# Altium PCB PCB.PcbDoc
Units mm, origin at the board's own origin, x right, y up, seen from the top; angles counter-clockwise.
Board outline 152.4 x 101.6 mm, 2 copper layers (Top Layer, Bottom Layer); 13 components, 22 nets, 71 pads, 0 vias.
Unrouted connection lines stored in the file: 30.
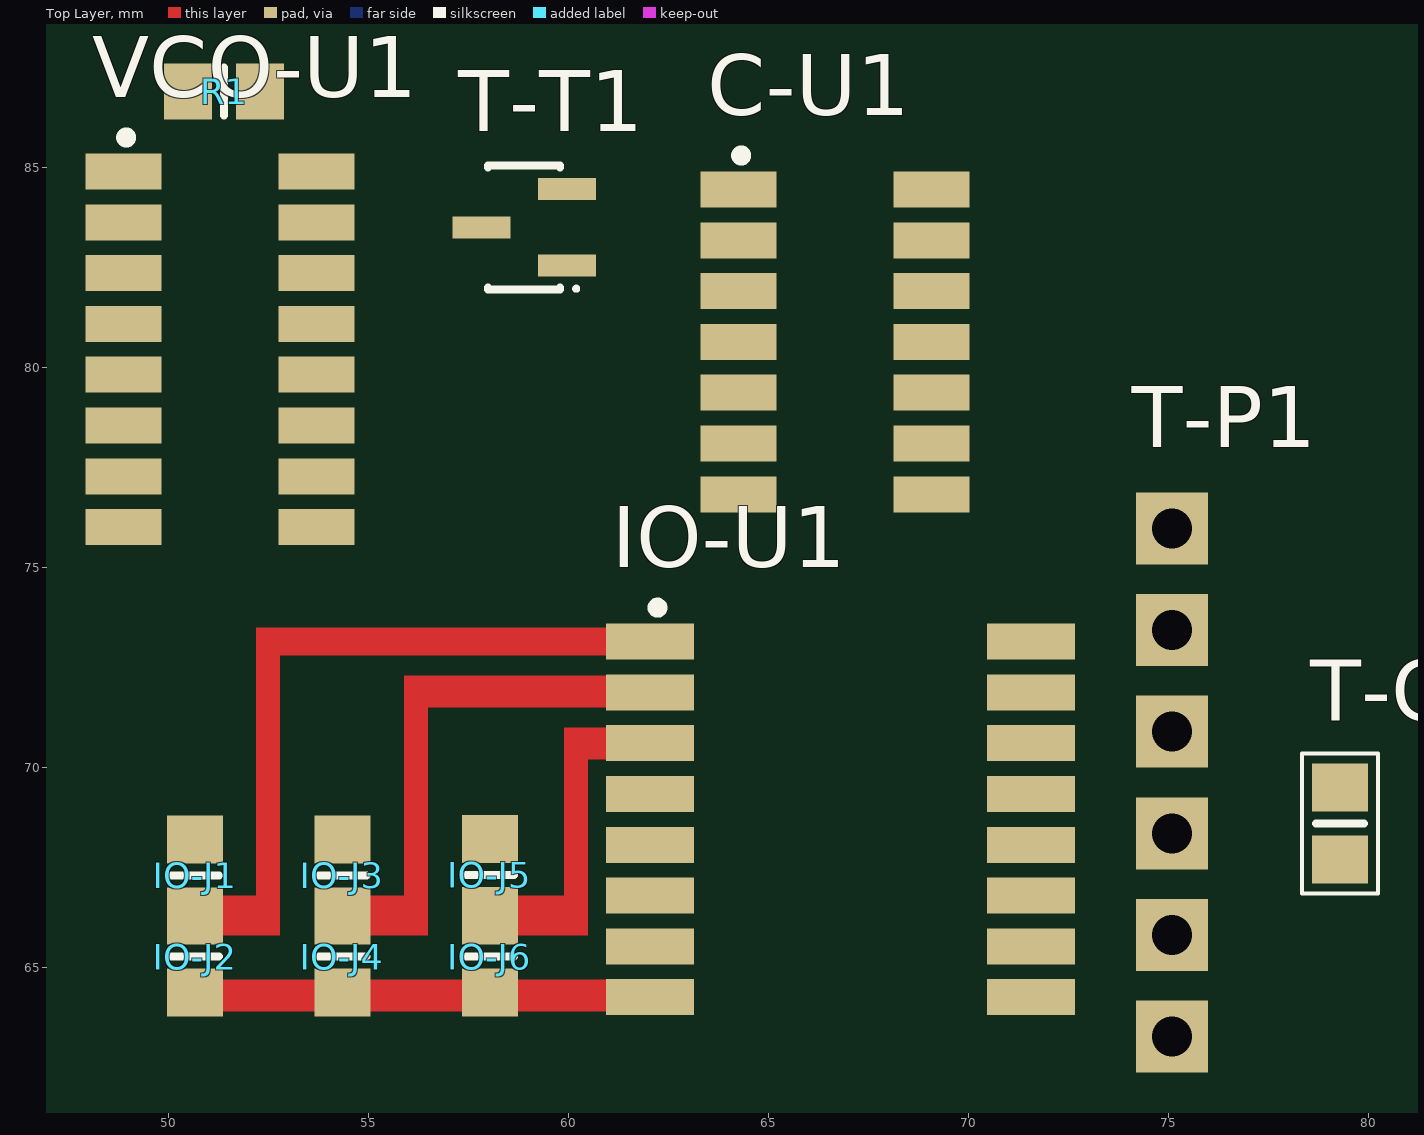
[diagram p0: Top Layer view]
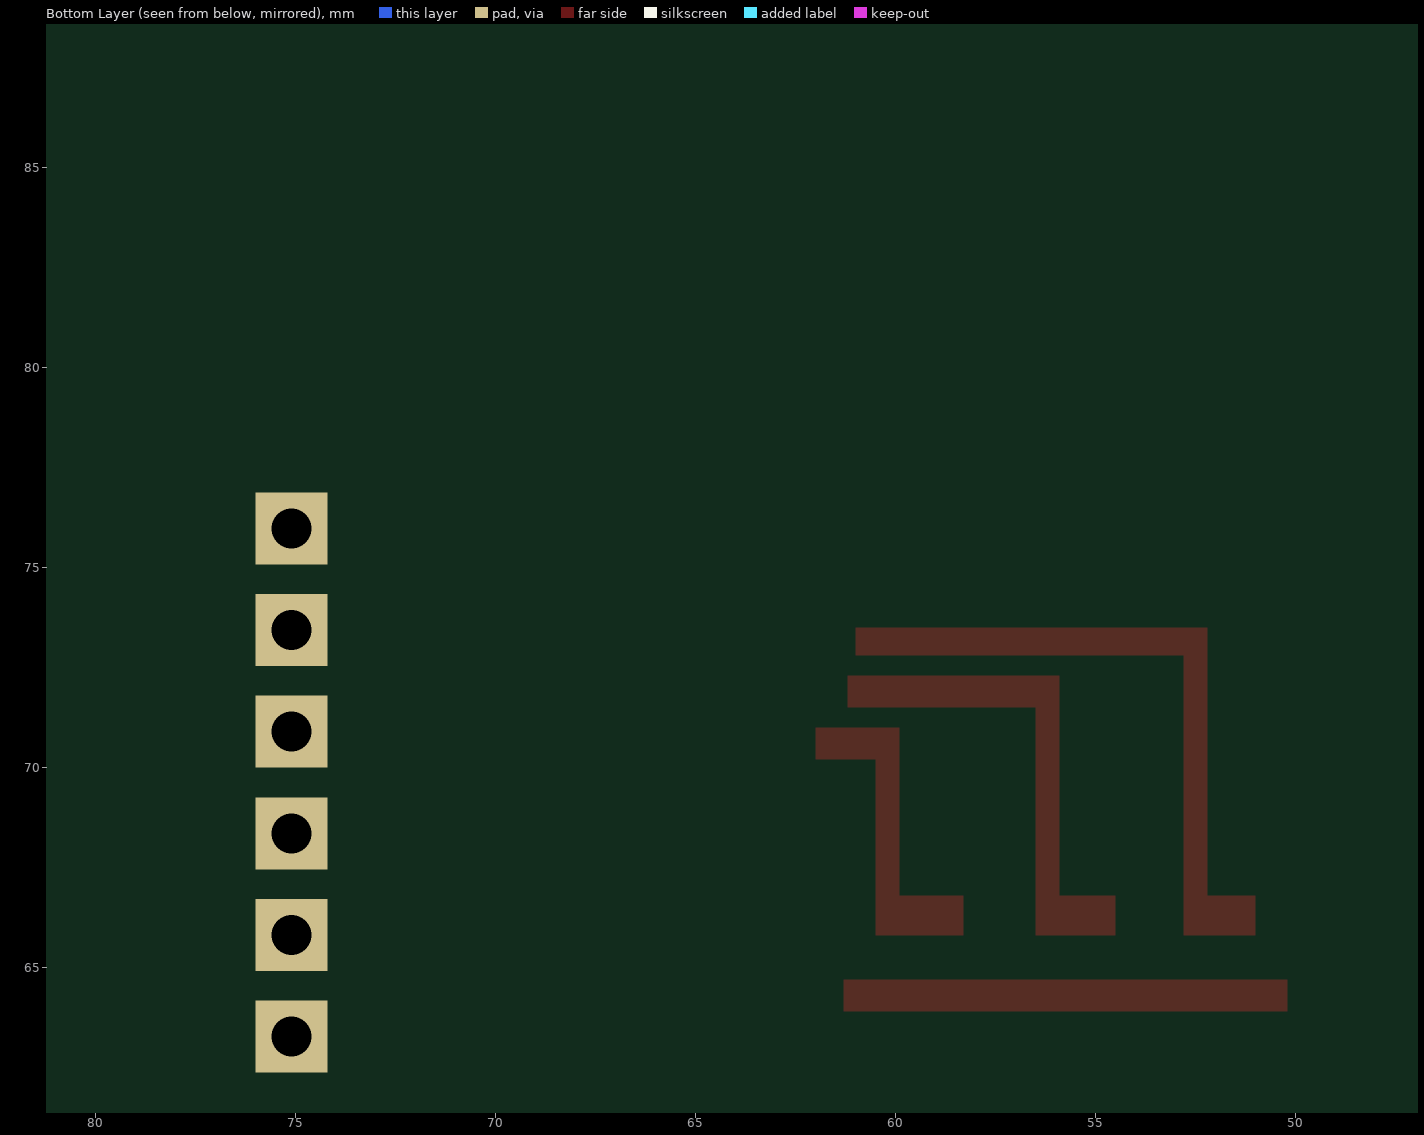
[diagram p1: Bottom Layer view, seen from below]

## Layer stack, top to bottom
Top Solder: solder mask 0.0102, Solder Resist, Dk 3.5
Top Layer: signal copper 0.0356
Dielectric 1: dielectric 0.32, FR-4, Dk 4.8
Bottom Layer: signal copper 0.0356
Bottom Solder: solder mask 0.0102, Solder Resist, Dk 3.5

## Board outline
25.4,25.4 177.8,25.4 177.8,127 25.4,127

## Design rules (kind name [scope] priority, off if disabled: settings)
Clearance [All] p1: gap=0.254
PolygonConnect [All] p1: connectstyle=Relief reliefconductorwidth=0.254 reliefentries=4 polygonreliefangle="90 Angle" airgapwidth=0.254
RoutingVias [All] p1: holewidth=0.711 width=1.27 viastyle="Through Hole" minholewidth=0.711 minwidth=1.27 maxholewidth=0.711 maxwidth=1.27
SolderMaskExpansion [All] p1: expansion=0.102
UnpouredPolygon [All] p1: allowunpoured=FALSE
Width [All] p1: maxlimit=0.254 minlimit=0.254 preferedwidth=0.254
29 further rules are at their usual default settings.

## Classes and differential pairs
component class Top: T-C2 T-P1 T-T1
component class Designator: IO-J1 IO-J2 IO-J3 IO-J4 IO-J5 IO-J6 IO-U1
component class CD4046: R1 VCO-U1
component class 74HC393: C-U1

## Components (designator, comment, footprint, x,y, rotation, side; value= is the part's Value field where it differs from the comment)
C-U1 "74HC393" SOIC-14 66.675,82.55 r0 top
IO-J1 "0R" "R 0805 / 2012" 50.673,67.31 r90 top
IO-J2 "0R" "R 0805 / 2012" 50.673,65.278 r90 top
IO-J3 "0R" "R 0805 / 2012" 54.356,67.31 r90 top
IO-J4 "0R" "R 0805 / 2012" 54.356,65.278 r90 top
IO-J5 "0R" "R 0805 / 2012" 58.039,67.321 r90 top
IO-J6 "0R" "R 0805 / 2012" 58.039,65.278 r90 top
IO-U1 "PCF8574" SOIC-16W 66.802,68.707 r0 top
R1 "100K" "R 0805 / 2012" 51.4,86.9 r180 top
T-C2 "1uF" "C 0805 / 2012" 79.3,68.6 r270 top
T-P1 "Header 1x6" "Header 1x6" 75.1,70.9 r270 top
T-T1 "2N7000" SOT-23-3 58.9,83.5 r90 top
VCO-U1 "CD4046" SOIC-16 51.3,83 r0 top

## Footprints (in the part's own frame and the unit in brackets; to place one, negate y for a bottom-side part, rotate by r counter-clockwise, add the part's x,y. Pads: shape width x height; smd on the part's side, far side on the other; paste and mask are expansions set on the pad)
"C 0805 / 2012" [mm] "Capacitor 0805 / 2012 (2.0 x 1.2 mm)"
  rect 1.2x1.4 smd: 1(-0.9,0) 2(0.9,0)
  silkscreen extent -1.75,-0.95 1.75,0.95, body extent -1,-0.62 1,0.62, height 0.78
"Header 1x6" [mm] "2.54mm"
  rect 1.8x1.8 hole 1: 1(-5.08,0) 2(-2.54,0) 3(0,0) 4(2.54,0) 5(5.08,0) 6(7.62,0)
  body extent -6.35,-1.27 8.89,1.27, height 8.6
"R 0805 / 2012" [mm] "Resistor 0805 / 2012 (2.0 x 1.2 mm)"
  rect 1.2x1.4 smd: 1(-0.9,0) 2(0.9,0)
  silkscreen extent 0,-0.6 0,0.6, body extent -1,-0.62 1,0.62, height 0.45
SOIC-14 [mm]
  rect 1.9x0.9 smd: 1(-2.413,1.905) 2(-2.413,0.635) 3(-2.413,-0.635) 4(-2.413,-1.905) 5(-2.413,-3.175) 6(-2.413,-4.445) 7(-2.413,-5.715) 8(2.413,-5.715) 9(2.413,-4.445) 10(2.413,-3.175) 11(2.413,-1.905) 12(2.413,-0.635) 13(2.413,0.635) 14(2.413,1.905)
  silkscreen extent -2.47,2.63 -2.22,2.88, body extent -3.05,-6.28 3.03,2.47, height 1.75
SOIC-16 [mm]
  rect 1.9x0.9 smd: 1(-2.413,1.905) 2(-2.413,0.635) 3(-2.413,-0.635) 4(-2.413,-1.905) 5(-2.413,-3.175) 6(-2.413,-4.445) 7(-2.413,-5.715) 8(-2.413,-6.985) 9(2.413,-6.985) 10(2.413,-5.715) 11(2.413,-4.445) 12(2.413,-3.175) 13(2.413,-1.905) 14(2.413,-0.635) 15(2.413,0.635) 16(2.413,1.905)
  silkscreen extent -2.47,2.63 -2.22,2.88, body extent -3.03,-7.54 3.05,2.46, height 1.75
SOIC-16W [mm]
  rect 2.2x0.9 smd: 1(-4.763,4.445) 2(-4.763,3.175) 3(-4.763,1.905) 4(-4.763,0.635) 5(-4.763,-0.635) 6(-4.763,-1.905) 7(-4.763,-3.175) 8(-4.763,-4.445) 9(4.763,-4.445) 10(4.763,-3.175) 11(4.763,-1.905) 12(4.763,-0.635) 13(4.763,0.635) 14(4.763,1.905) 15(4.763,3.175) 16(4.763,4.445)
  silkscreen extent -4.7,5.17 -4.45,5.42, body extent -5.2,-5.25 5.2,5.25, height 2.65
SOT-23-3 [mm]
  rect 0.55x1.45 smd: 1(-0.95,-1.075) 2(0.965,-1.067) 3(0,1.067)
  silkscreen extent -1.57,-1.35 1.55,0.9, body extent -1.49,-1.32 1.51,1.28, height 1.1

## Part data
C-U1: "Dual 4-Bit Counter"
IO-J1 IO-J2 IO-J3 IO-J4 IO-J5 IO-J6 R1: library part Resistor
IO-U1: "8-Bit I/O-Expander"
T-C2: library part Capacitor
T-T1: "N-FET"
VCO-U1: "PLL / VCO"

## Nets (pads, with @x,y where several pads share a name; then routed paths per layer and width w, separated by ;. In a path a pad name is that pad's centre, name@x,y a point inside that pad or via, vN(x,y) a via of type N, cw(c..) or ccw(c..) an arc to the next point about the centre after c; other vN are vias at no path point)
3.3V: C-U1.14 IO-J1.2 IO-J3.2 IO-J5.2 IO-U1.16 T-C2.1 T-P1.1 VCO-U1.16
GND: C-U1.7 IO-J2.1 IO-J4.1 IO-J6.1 IO-U1.8 R1.2 T-C2.2 T-P1.6 VCO-U1.5 VCO-U1.8
NetC-U1_1: C-U1.1 T-T1.2
NetC-U1_2: C-U1.2 C-U1.12 T-P1.4
NetC-U1_3: C-U1.3 IO-U1.4
NetC-U1_4: C-U1.4 IO-U1.5
NetC-U1_5: C-U1.5 IO-U1.6
NetC-U1_6: C-U1.6 C-U1.13 IO-U1.7
NetC-U1_8: C-U1.8 IO-U1.9
NetC-U1_9: C-U1.9 IO-U1.10
NetC-U1_10: C-U1.10 IO-U1.11
NetC-U1_11: C-U1.11 IO-U1.12
NetIO-J1_1: IO-J1.1 IO-J2.2 IO-U1.1
NetIO-J3_1: IO-J3.1 IO-J4.2 IO-U1.2
NetIO-J5_1: IO-J5.1 IO-J6.2 IO-U1.3
NetIO-U1_14: IO-U1.14 T-P1.2
NetIO-U1_15: IO-U1.15 T-P1.3
NetR1_1: R1.1 VCO-U1.12
NetT-C1_1: VCO-U1.6
NetT-C1_2: VCO-U1.7
NetT-P1_5: T-P1.5 T-T1.1
NetT-T1_3: T-T1.3 VCO-U1.4
pads on no net: IO-U1.13 VCO-U1.1 VCO-U1.2 VCO-U1.3 VCO-U1.9 VCO-U1.10 VCO-U1.11 VCO-U1.13 VCO-U1.14 VCO-U1.15

## Other copper
Top Layer:
  rectangle net GND: 50.2,63.9 61.3,64.7
  rectangle net NetIO-J1_1: 52.8,72.8 61,73.5
  rectangle net NetIO-J3_1: 56.5,71.5 61.2,72.3
  rectangle net NetIO-J1_1: 52.2,65.8 52.8,73.5
  rectangle net NetIO-J1_1: 51,65.8 52.6,66.8
  rectangle net NetIO-J3_1: 54.5,65.8 56.1,66.8
  rectangle net NetIO-J3_1: 55.9,65.8 56.5,72.3
  rectangle net NetIO-J5_1: 58.3,65.8 59.9,66.8
  rectangle net NetIO-J5_1: 59.9,65.8 60.5,70.2
  rectangle net NetIO-J5_1: 59.9,70.2 62,71